# Altium PCB BusinessCardPCB.PcbDoc
Units mm, origin at the board's own origin, x right, y up, seen from the top; angles counter-clockwise.
Board outline 86.23 x 54.48 mm, 2 copper layers (Top Layer, GND); 13 components, 10 nets, 47 pads, 18 vias.
Unrouted connection lines stored in the file: 1.
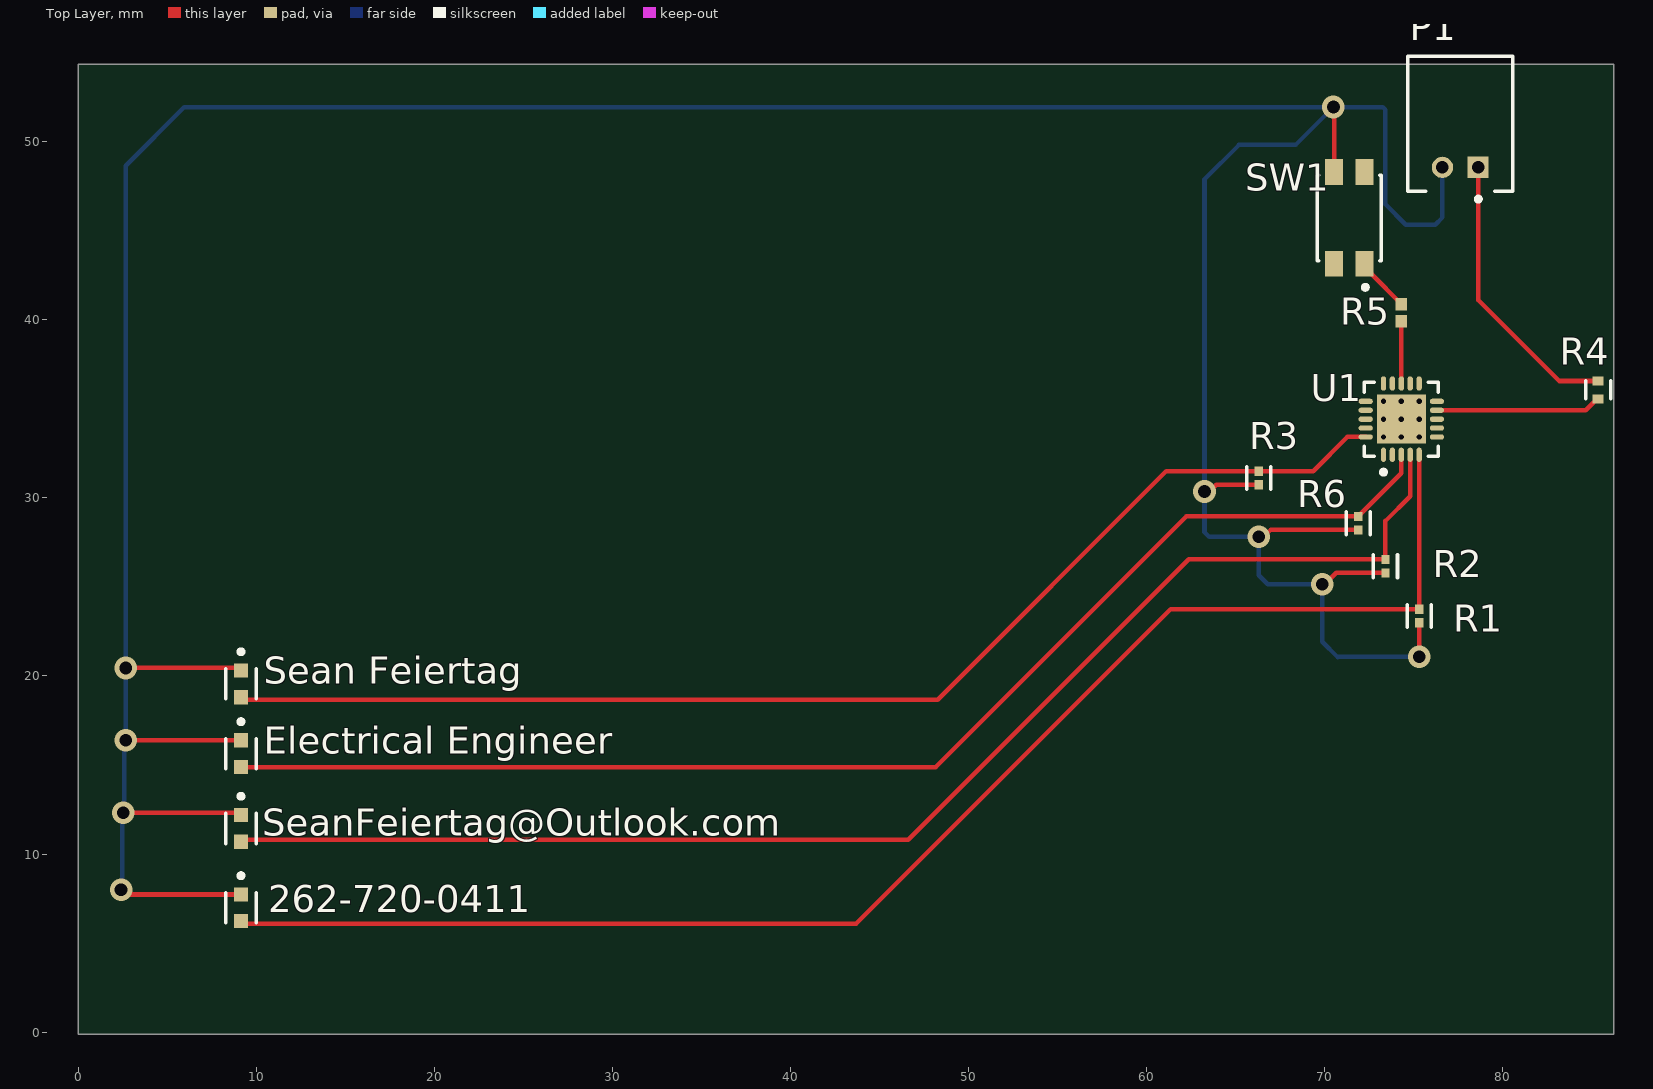
[diagram p0: Top Layer view]
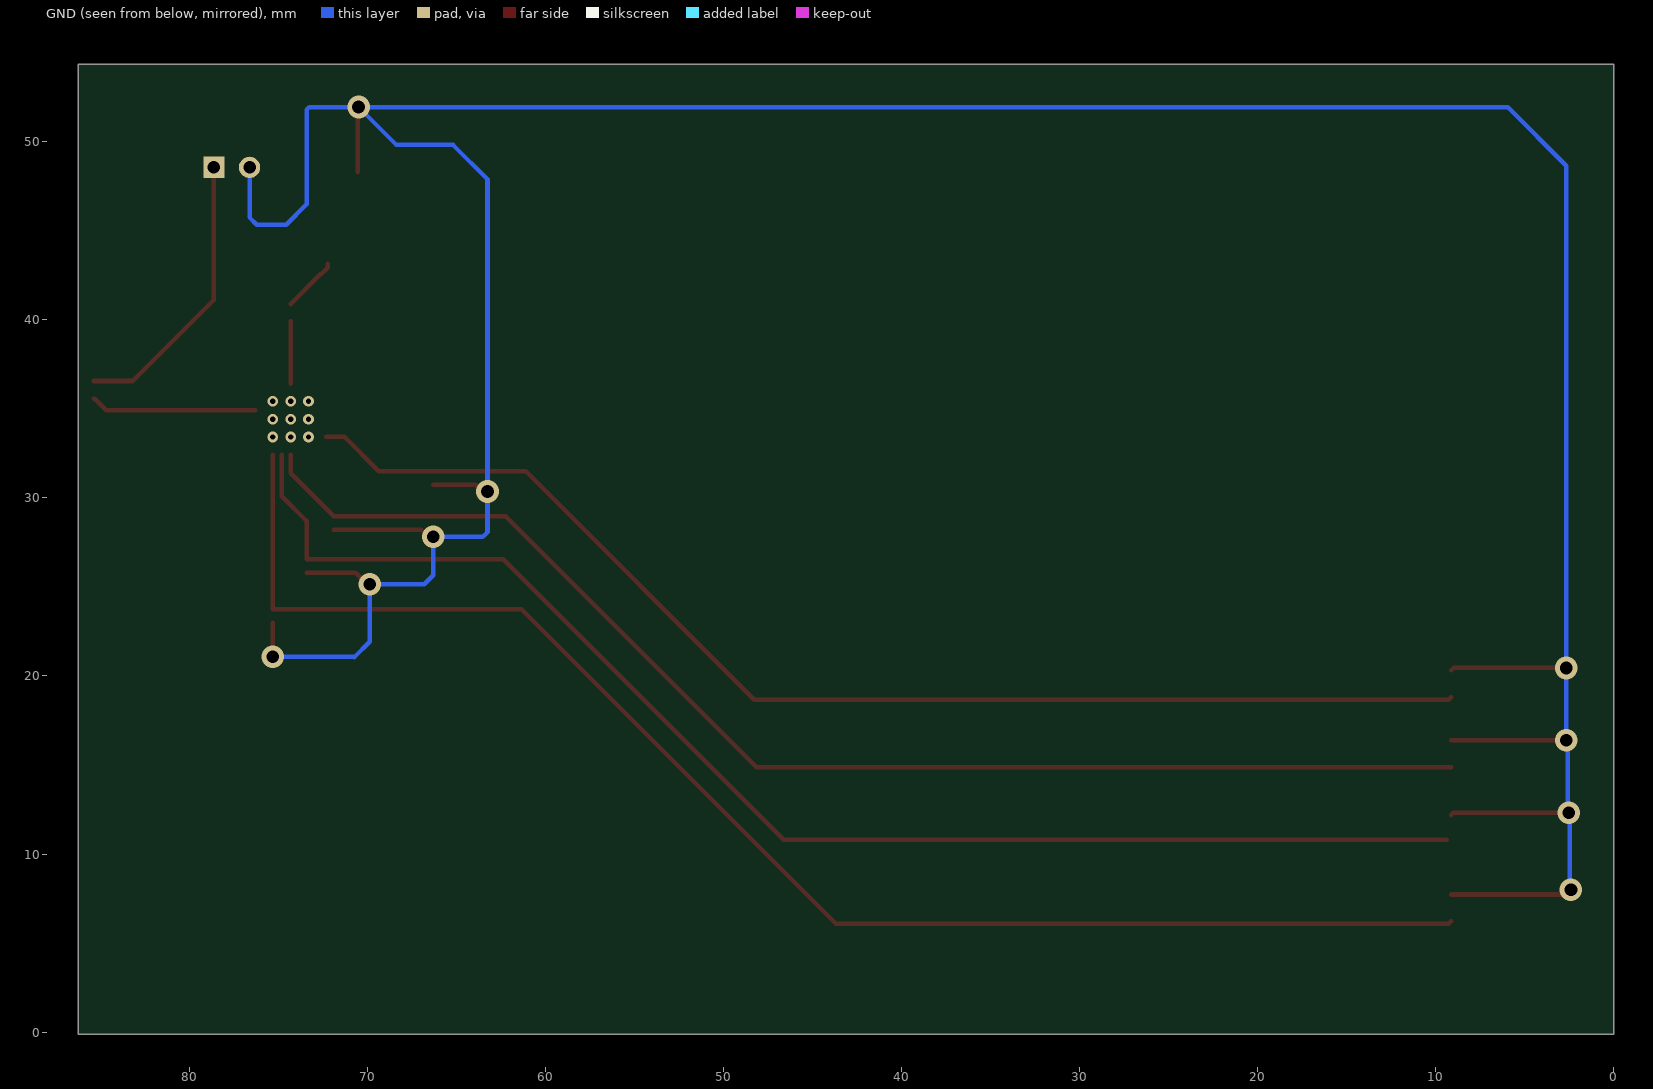
[diagram p1: GND view, seen from below]
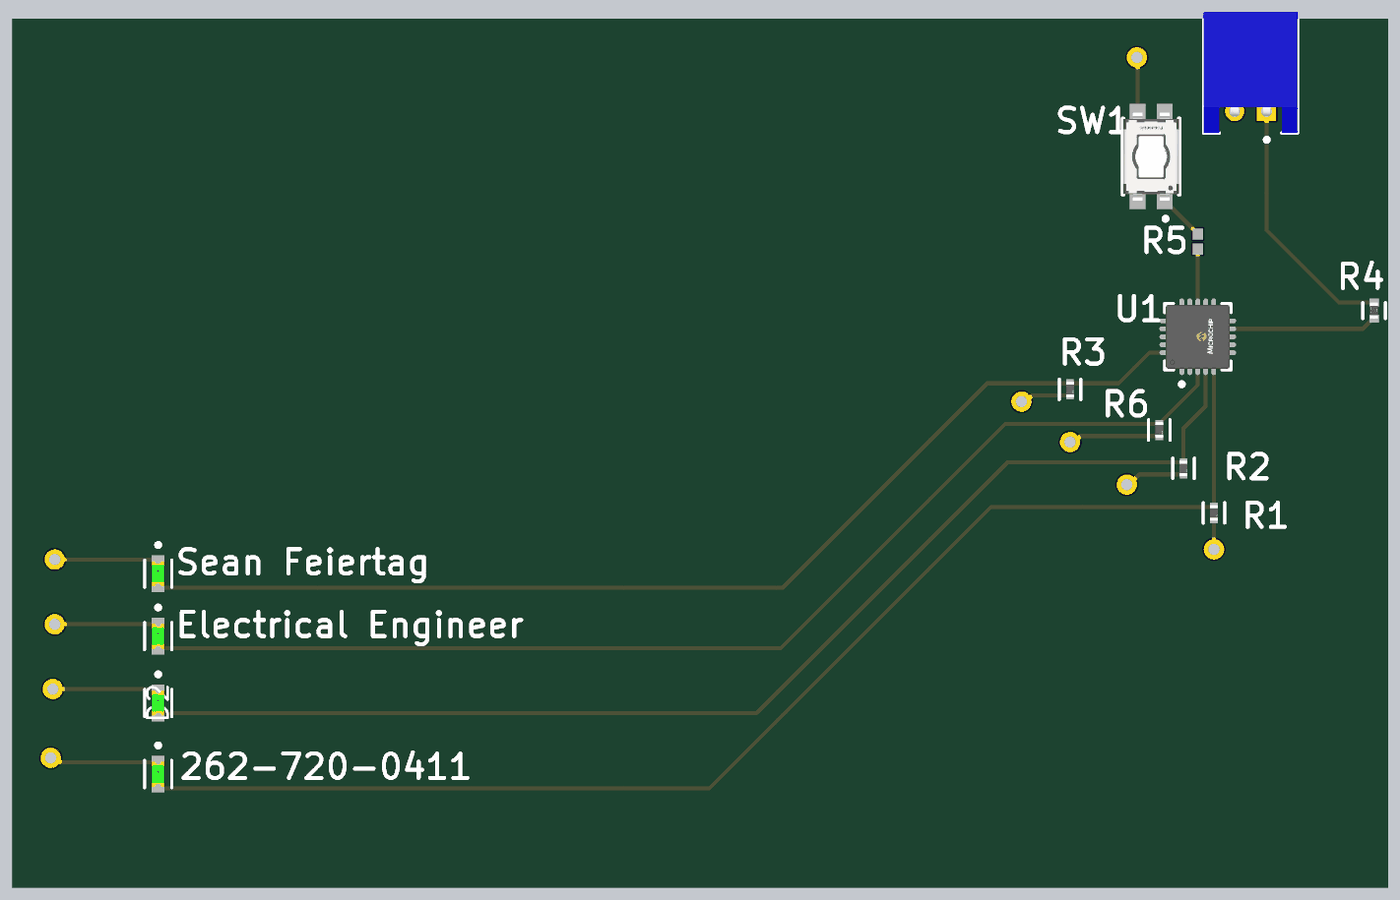
[diagram p2: 3D render of the assembled board from above, using the file's embedded part models]

## Layer stack, top to bottom
Top Solder: solder mask 0.0102, Solder Resist, Dk 3.5
Top Layer: signal copper 0.0356
Dielectric 1: dielectric 0.32, FR-4, Dk 4.8
GND: signal copper 0.0356
Bottom Solder: solder mask 0.0102, Solder Resist, Dk 3.5

## Board outline
0,-0.127 86.233,-0.127 86.233,54.356 0,54.356

## Design rules (kind name [scope] priority, off if disabled: settings)
Clearance [All] p1: gap=0.2 ignorepadtopadclearanceinfootprint=FALSE
PolygonConnect [All] p1: connectstyle=Relief reliefconductorwidth=0.254 reliefentries=4 polygonreliefangle="90 Angle" airgapwidth=0.254
RoutingVias [All] p1: holewidth=0.711 width=1.27 viastyle="Through Hole" minholewidth=0.711 minwidth=1.27 maxholewidth=0.711 maxwidth=1.27
SolderMaskExpansion [All] p1: expansion=0.102 istentingtop=FALSE
SupplyNets "Schematic Supply Nets" [InNet('GND')] p1: voltage=0.000
Width [All] p1: maxlimit=0.254 minlimit=0.254 preferedwidth=0.254
30 further rules are at their usual default settings.

## Components (designator, comment, footprint, x,y, rotation, side; value= is the part's Value field where it differs from the comment)
262-720-0411 "LTST-C190GKT" FP-LTST-C190GKT-MFG 9.144,6.985 r270 top (schematic designator D1)
"Electrical Engineer" "LTST-C190GKT" FP-LTST-C190GKT-MFG 9.144,15.633 r270 top (schematic designator D4)
P1 "S2B-PH-K-S(LF)(SN)" JST-S2B-PH-K-S_V 77.605,51.003 r180 top
R1 "RC0402JR-0710KL" FP-RC0402-0_4-IPC_C 75.311,23.368 r270 top
R2 "RC0402JR-0710KL" FP-RC0402-0_4-IPC_C 73.406,26.164 r270 top
R3 "RC0402JR-0710KL" FP-RC0402-0_4-IPC_C 66.294,31.115 r270 top
R4 "30.9k 0402" FP-RT0402-MFG 85.344,36.06 r90 top value=30.9KΩ
R5 "40.2k 0402" RESC1005X40X25ML05T10 74.295,40.386 r270 top
R6 "RC0402JR-0710KL" FP-RC0402-0_4-IPC_C 71.882,28.575 r270 top
"Sean Feiertag" "LTST-C190GKT" FP-LTST-C190GKT-MFG 9.144,19.558 r270 top (schematic designator D3)
SeanFeiertag@Outlook.com "LTST-C190GKT" FP-LTST-C190GKT-MFG 9.144,11.442 r270 top (schematic designator D2)
SW1 "EVQ-P2602W" FP-EVQ-P2602W-MFG 71.374,45.72 r270 top
U1 "ATTINY84A-MFR" FP-C04-21443-MFG 74.295,34.417 r90 top

## Footprints (in the part's own frame and the unit in brackets; to place one, negate y for a bottom-side part, rotate by r counter-clockwise, add the part's x,y. Pads: shape width x height; smd on the part's side, far side on the other; paste and mask are expansions set on the pad)
FP-C04-21443-MFG [mm]
  rrect100% 0.8x0.3 smd paste+0 mask+0: 1(-2,1) 2(-2,0.5) 3(-2,0) 4(-2,-0.5) 5(-2,-1) 11(2,-1) 12(2,-0.5) 13(2,0) 14(2,0.5) 15(2,1)
  rrect100% 0.3x0.8 smd paste+0 mask+0: 6(-1,-2) 7(-0.5,-2) 8(0,-2) 9(0.5,-2) 10(1,-2) 16(1,2) 17(0.5,2) 18(0,2) 19(-0.5,2) 20(-1,2)
  rect 2.75x2.75 smd paste+0 mask+0: 21(0,0)
  silkscreen extent -3.1,-2.07 2.07,2.07, body extent -2.5,-2.5 2.5,2.5, height 0.25
FP-EVQ-P2602W-MFG [mm]
  rect 1.45x1 smd paste+0 mask+0: 1(2.575,0.85) 2(2.575,-0.85) 3(-2.575,0.85) 4(-2.575,-0.85)
  silkscreen extent -2.4,-1.8 4.02,1.8, body extent -3.4,-1.9 3.4,1.9, height 0.25
FP-LTST-C190GKT-MFG [mm]
  rect 0.8x0.8 smd paste+0 mask+0: 1(-0.75,0) 2(0.75,0)
  silkscreen extent -1.92,-0.85 0.85,0.85, body extent -1.25,-0.55 1.25,0.55, height 0.25
FP-RC0402-0_4-IPC_C [mm]
  rect 0.515x0.472 smd paste+0 mask+0: 1(-0.379,0) 2(0.379,0)
  silkscreen extent -0.64,-0.67 0.64,0.67, body extent -0.74,-0.38 0.74,0.38, height 0.25
FP-RT0402-MFG [mm]
  rect 0.5x0.6 smd paste+0 mask+0: 1(-0.5,0) 2(0.5,0)
  silkscreen extent -0.5,-0.71 0.5,0.7, body extent -0.85,-0.4 0.85,0.4, height 0.25
JST-S2B-PH-K-S_V [mm] "THD, 2-Leads, Body 7.6x5.9mm, Pitch 2mm"
  rect 1.2x1.2 hole 0.7: 1(-1,2.45)
  round 1.2 hole 0.7: 2(1,2.45)
  silkscreen extent -2.95,-3.8 2.95,4.35, body extent -2.95,-3.8 2.95,3.8, height 4.8
RESC1005X40X25ML05T10 [mm] "Chip Resistor, 2-Leads, Body 1.00x0.50mm, IPC Low Density"
  rect 0.7x0.65 smd: 1(-0.475,0) 2(0.475,0)
  body extent -0.53,-0.27 0.53,0.28, height 0.4

## Part data
262-720-0411 "Electrical Engineer" "Sean Feiertag" SeanFeiertag@Outlook.com: library part CMP-22017-000005-2, "LED GREEN CLEAR CHIP SMD", Case Code (Imperial)=0603, Case Code (Metric)=1608, Color=Green, Forward Current=30mA, Forward Voltage=2.1V, Lens Color=Colorless, Max Operating Temperature=85°C, Min Operating Temperature=-55°C, Package Quantity=1, Power Dissipation=100mW, Reverse Voltage=5V, Test Current=10mA, Voltage=2V, Case/Package=0603, Depth=0.8mm, Dominant Wavelength=569nm, Height=0.8mm, Illumination Color=Green, Lead Free="Lead Free", Length=1.6mm, Lens Style=Clear, Lens Transparency=Clear, Luminous Intensity=6mcd, Mount="Surface Mount", Number of Elements=1, Number of LEDs=1, Number of Pins=2, Packaging="Tape and Reel", Power Rating=100mW, Radiation Hardening=No, Viewing Angle=130°, Wavelength=565nm, Width=0.8mm
P1: library part CMP-1755-00004-1, "Male Header, Pitch 2 mm, 1 x 2 Position, Height 4.8 mm, Tail Length 3.4 mm, -25 to 85 degC, RoHS, Bulk", Capacitance="10 uF", Case\Package=Radial, Max Operating Temperature="85 degC", Min Operating Temperature="-40 degC", Package Quantity=200, Tolerance=20%, Voltage Rating="50 V", ComponentLink1Description=Datasheet, ComponentLink1URL=http://www.jst-mfg.com/product/pdf/eng/ePH.pdf, DatasheetVersion=Dec-12, Diameter="5 mm", Height="11 mm", Lead Pitch="2 mm", Length="11 mm", Mount="Through Hole", PackageDescription="Male Header, Pitch 2 mm, 1 x 2 Position, Height 4.8 mm, Tail Length 3.4 mm", PackageReference=S2B-PH-K-S, Packaging=Bulk, Pins=2, Radiation Hardening=No, REACH SVHC="No SVHC", RoHSCompliant=true, Voltage Rating (DC)="50 V"
R1 R2 R3 R6: library part CMP-2002-07915-3, "RES 10K OHM 5% 1/16W 0402", Case Code (Imperial)=0402, Case Code (Metric)=1005, Max Operating Temperature=155°C, Max Power Dissipation=63mW, Min Operating Temperature=-55°C, Package Quantity=1, Power Rating=62.5mW, Resistance=10kR, Resistance Tolerance=5%, Resistor Type="Thick Film", Temperature Coefficient=100ppm/°C, Voltage Rating=50V, Case/Package=0402, Construction=Rectangular, Depth=0.5mm, Features="Moisture Resistant", Height=0.016inch, Lead Free="Lead Free", Length=0.039inch, Military Standard=Not, Number of Terminations=2, Packaging="Tape and Reel", RoHS Compliant=Yes, Series=RC, Size Code=0402, Termination=SMD/SMT, Tolerance=5%, Width=0.02inch
R4: library part CMP-03412-014653-1, "RES SMD 30.9KOHM 0.1% 1/16W 0402", Manufacturer=Yageo, Manufacturer Part Number=RT0402BRE0730K9L, Package=RT0402, Power Rating=0.063W, Resistance=30.9KΩ, Temperature="-55°C to +155°C", Temperature Coefficient="50 ppm/°C", Temperature Range High=+155°C, Temperature Range Low=-55°C, Tolerance=0.001, Voltage Rating=50V, Automotive=No, Category=Res, ComponentLink2Description=Datasheet, ComponentLink2URL=http://www.yageo.com/documents/recent/PYu-RT_1-to-0.01_RoHS_L_9.pdf, Composition="Thin Film", Device Class L1="Passive Components", Device Class L2=Resistors, Device Class L3="Chip SMD Resistors", Digikey Description="RES SMD 30.9KOHM 0.1% 1/16W 0402", Footprint Url=http://www.yageo.com/exep/pages/download/literatures/PYu-R_Mount_10.pdf, Height=0.35mm, Ipc Land Pattern Name=RESC10050X30, Lead Free=Yes, Octopart=https://octopart.com/rt0402bre0730k9l-yageo-1370119, RoHS=TRUE, Series=RT
R5: library part CMP-2002-07676-1, Manufacturer="Yageo / Phycomp", Part Number=RC0402FR-0740K2L
SW1: library part CMP-00287-39836447-1, "EVQ-P2602W Switch Tactile N.O. SPST Button J-Bend 0.02A 15VDC 3.5N SMD Automotive Embossed T/R", Contact Current Rating=20mA, Contact Resistance=100mΩ, Max Operating Temperature=85°C, Max Voltage Rating (DC)=15V, Min Operating Temperature=-40°C, Operating Force=3.5N, Actuator Length=850µm, Contact Plating="Gold, Silver", Current Rating=20mA, Depth=5.5mm, Electrical Life=200kcycles, Height=2.5mm, Illumination Type="Illuminated, Non-Illuminated", Lead Free="Lead Free", Length=3.5mm, Max Current Rating=20mA, Mechanical Life=200kcycles, Mount="Surface Mount", NexarPartId=39836447, Number of Positions=2, Orientation=Straight, Radiation Hardening=No, REACH SVHC="No SVHC", RoHS=Compliant, Switch Function=Off-Mom, Switch Travel=250µm, Termination=J-Bend, Throw Configuration=SPST, Voltage Rating (DC)=15V, Width=4.7mm
U1: library part CMP-00252-77762303-1, "ATTINY84A-MFR AVR, 8K FLASH 2K SRAM, 1KB EEPROM - 16MHz, 4x4WQFN, High Grade +125C, Green, T&R", Ambient Temperature Range High=125°C, Case/Package=QFN, Frequency=20MHz, Max Operating Temperature=85°C, Max Supply Voltage=5.5V, Min Operating Temperature=-40°C, Min Supply Voltage=1.8V, Core Architecture=AVR, Data Bus Width=8b, Height=800µm, Interface=SPI, Lifecycle Status=Production, Max Frequency=20MHz, Memory Size=8kB, Memory Type=FLASH, NexarPartId=77762303, Number of A/D Converters=1, Number of ADC Channels=8, Number of I2C Channels=1, Number of I/Os=12, Number of PWM Channels=4, Number of SPI Channels=1, Number of Timers/Counters=3, Number of UART Channels=1, Oscillator Type=Internal, Peripherals="Brown-out Detect/Reset, POR, PWM, Temp Sensor, WDT", RAM Size=512B, RoHS=Compliant

## Via types
v1: diameter 1.27, hole 0.711, Top Layer to GND, 9 vias
v2: diameter 0.6, hole 0.3, Top Layer to GND, 9 vias

## Nets (pads, with @x,y where several pads share a name; then routed paths per layer and width w, separated by ;. In a path a pad name is that pad's centre, name@x,y a point inside that pad or via, vN(x,y) a via of type N, cw(c..) or ccw(c..) an arc to the next point about the centre after c; other vN are vias at no path point)
"Exposed Pad": U1.21
  other v2: 73.295,33.417 74.295,33.417 75.295,33.417 73.295,34.417 74.295,34.417 75.295,34.417 73.295,35.417 74.295,35.417 75.295,35.417
GND: 262-720-0411.1 "Electrical Engineer.1" "Sean Feiertag.1" P1.2 R1.2 R2.2 R3.2 R6.2 SeanFeiertag@Outlook.com.1 SW1.4 U1.8 | length 216.6
  Top Layer w0.254: v1(2.413,8.001) 2.688,8.001 2.961,7.728 262-720-0411.1@9.144,7.728 ; v1(2.54,12.319) 9.017,12.319 9.144,12.192 ; v1(2.667,16.383) 9.144,16.383 ; v1(2.667,20.447) 9.005,20.447 9.144,20.308 ; v1(63.246,30.353) 63.521,30.353 63.904,30.736 R3.2 ; v1(66.294,27.813) 66.569,27.813 66.952,28.196 R6.2 ; v1(69.85,25.146) 70.007,25.146 70.647,25.786 R2.2 ; v1(70.485,51.943) 70.524,51.904 SW1.4 ; v1(75.311,21.082) R1.2
  GND w0.254: v1(2.413,8.001) 2.476,8.064 2.476,12.255 v1(2.54,12.319) 2.603,12.383 2.603,16.319 v1(2.667,16.383) v1(2.667,20.447) 2.667,48.641 5.969,51.943 v1(70.485,51.943) ; v1(75.311,21.082) 70.739,21.082 70.717,21.06 69.85,21.927 v1(69.85,25.146) 66.802,25.146 66.294,25.654 v1(66.294,27.813) 63.5,27.813 63.246,28.067 v1(63.246,30.353) 63.246,47.879 65.181,49.814 68.356,49.814 v1(70.485,51.943) ; P1.2 76.605,45.744 76.2,45.339 74.549,45.339 73.406,46.482 73.406,51.794 73.257,51.943 v1(70.485,51.943)
NetD1_2: 262-720-0411.2 R1.1 U1.5 | length 82.2
  Top Layer w0.254: 262-720-0411.2 9.283,6.096 43.688,6.096 61.339,23.747 R1.1@75.303,23.747 ; U1.5 75.303,32.409 R1.1@75.303,23.747 ; R1.1 R1.1@75.303,23.747
NetD2_2: R2.1 SeanFeiertag@Outlook.com.2 U1.4 | length 77
  Top Layer w0.254: 9.398,10.807 46.621,10.807 62.357,26.543 R2.1 73.406,28.702 74.795,30.091 U1.4
NetD3_2: "Sean Feiertag.2" R3.1 U1.20 | length 69.3
  Top Layer w0.254: 9.144,18.808 9.283,18.669 48.26,18.669 61.085,31.494 R3.1 ; R3.1@66.294,31.496 69.342,31.496 71.263,33.417 U1.20
NetD4_2: "Electrical Engineer.2" R6.1 U1.3 | length 73
  Top Layer w0.254: 9.144,14.883 48.157,14.883 62.228,28.954 R6.1 ; R6.1@71.882,28.975 74.295,31.388 U1.3
NetP1_1: P1.1 R4.2 | length 16.1
  Top Layer w0.254: P1.1@78.589,48.553 P1.1@78.605,48.537 ; P1.1@78.613,48.537 78.613,41.106 83.159,36.56 R4.2
NetR4_1: R4.1 U1.9 | length 9.3
  Top Layer w0.254: U1.9 84.651,34.917 85.294,35.56 R4.1
NetR5_1: R5.1 SW1.1 | length 3.2
  Top Layer w0.254: SW1.1 72.224,42.92 72.597,42.547 72.634,42.547 74.295,40.886 R5.1
NetR5_2: R5.2 U1.13 | length 3.5
  Top Layer w0.254: U1.13 R5.2
pads on no net: SW1.2 SW1.3 U1.1 U1.2 U1.6 U1.7 U1.10 U1.11 U1.12 U1.14 U1.15 U1.16 U1.17 U1.18 U1.19